# Altium PCB PCB1.PcbDoc
Units mil, origin at the board's own origin, x right, y up, seen from the top; angles counter-clockwise.
Board outline 4000 x 4000 mil, 2 copper layers (Top Layer, Bottom Layer); 10 components, 11 nets, 34 pads, 4 vias.
Unrouted connection lines stored in the file: 23.
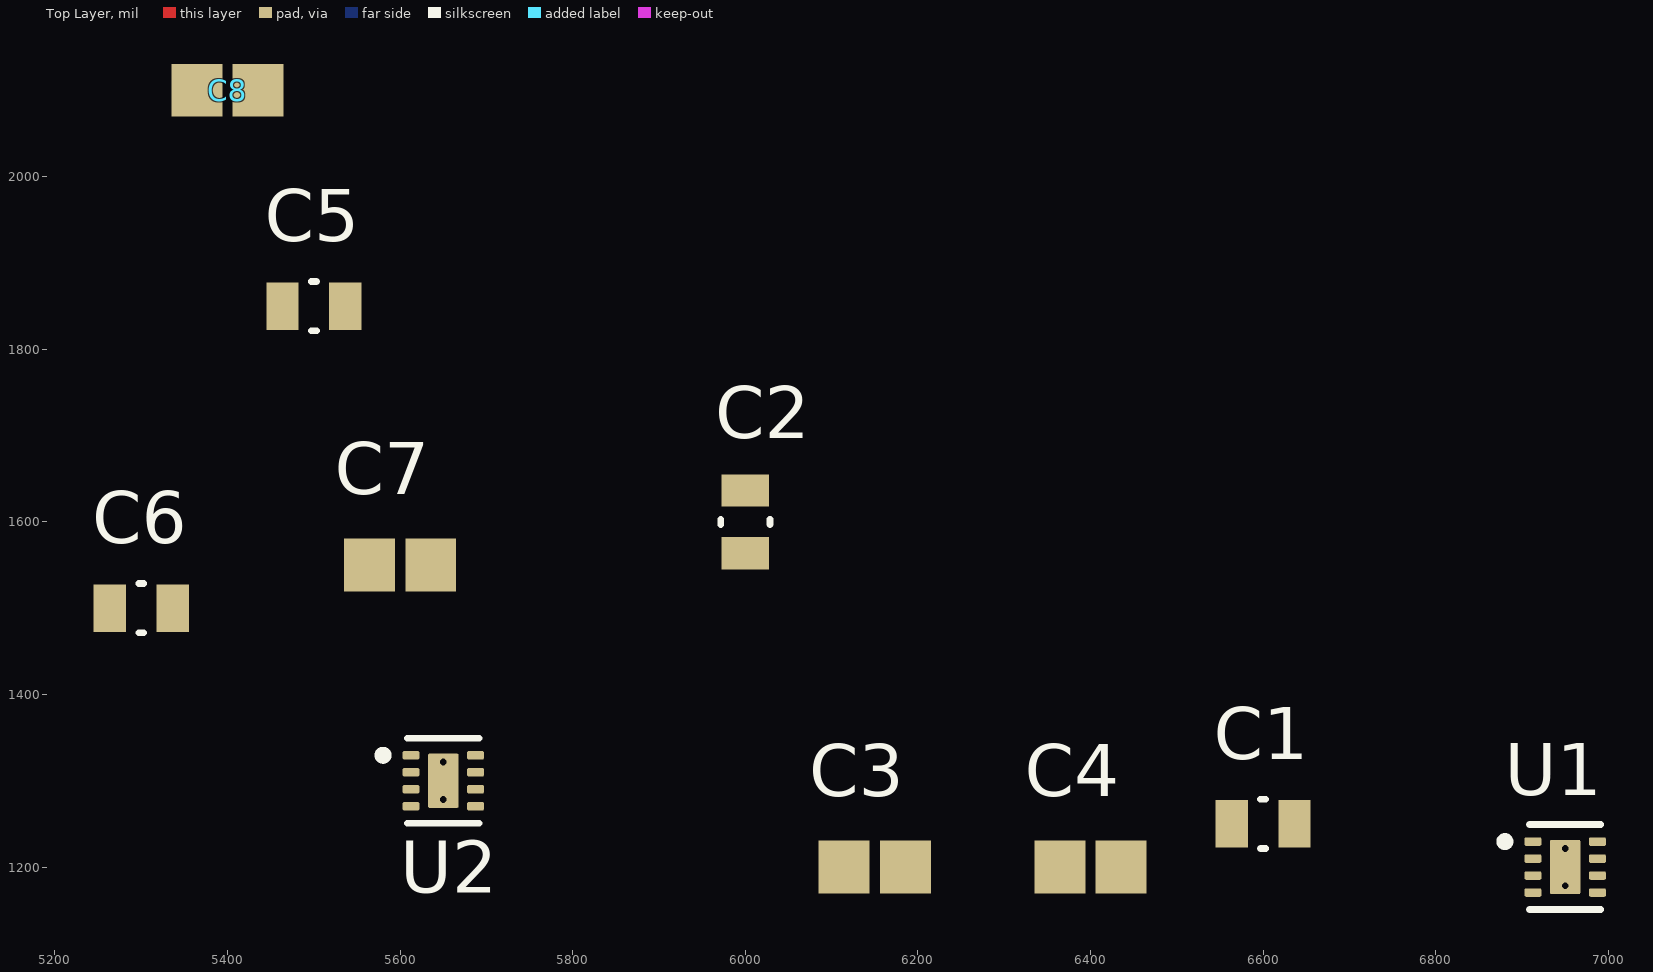
[diagram p0: Top Layer view]
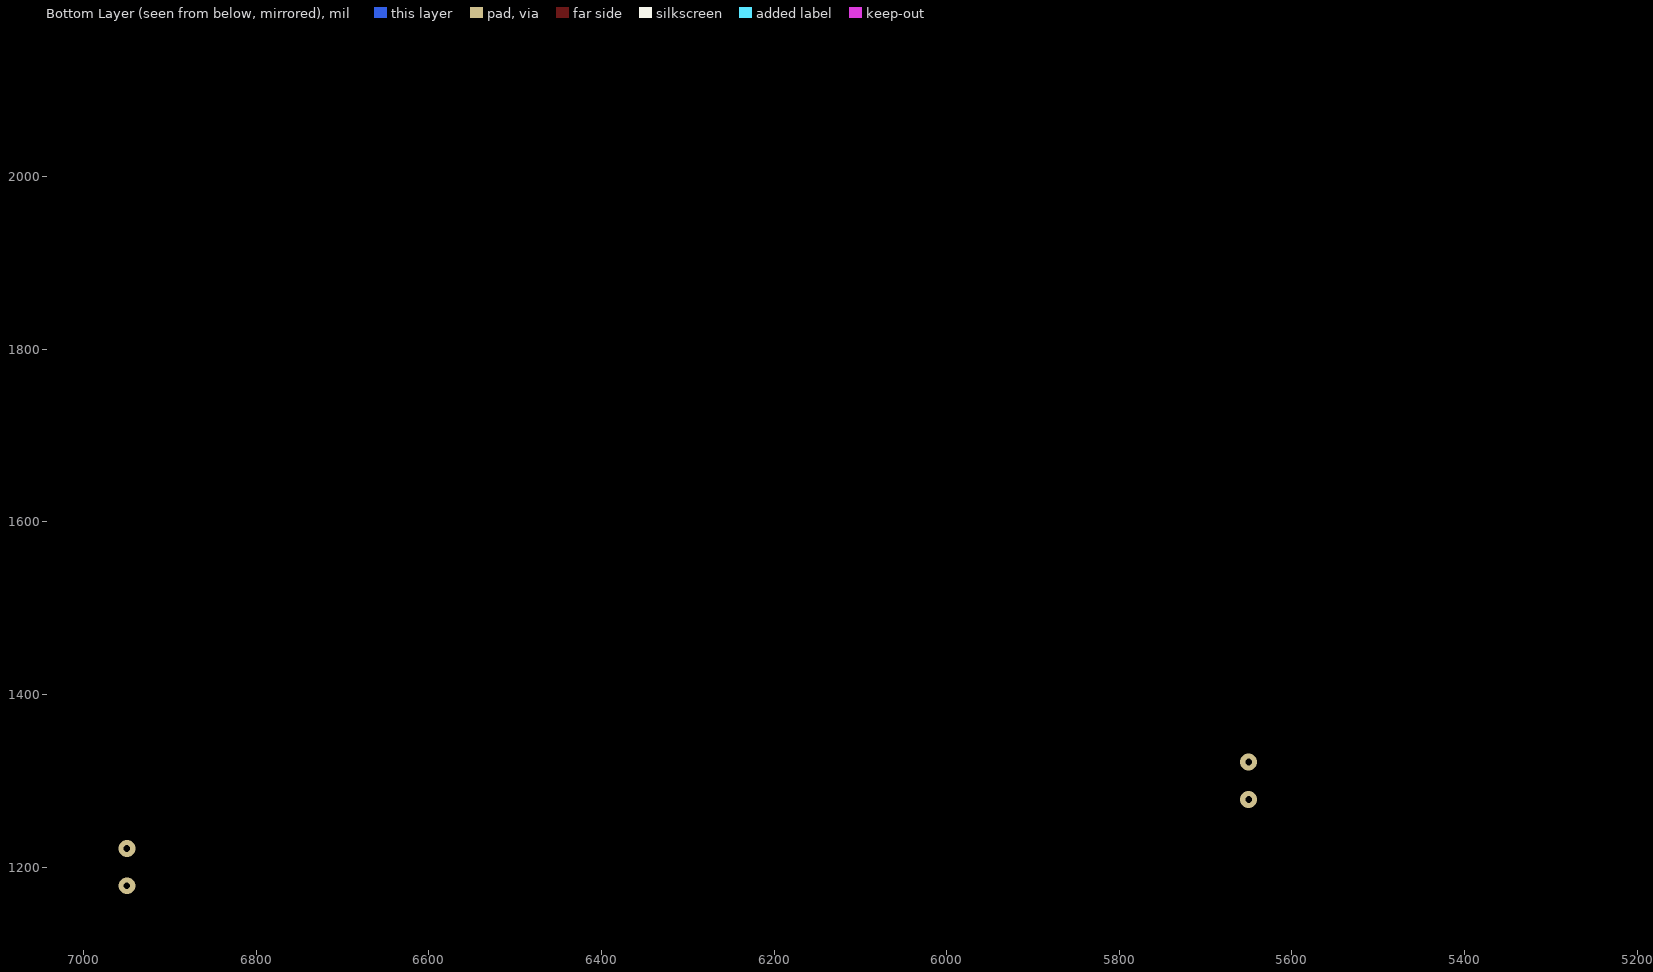
[diagram p1: Bottom Layer view, seen from below]

## Layer stack, top to bottom
Top Solder: solder mask 0.4, Solder Resist, Dk 3.5
Top Layer: signal copper 1.4
Dielectric 1: dielectric 12.6, FR-4, Dk 4.8
Bottom Layer: signal copper 1.4
Bottom Solder: solder mask 0.4, Solder Resist, Dk 3.5

## Board outline
1000,1000 5000,1000 5000,5000 1000,5000

## Design rules (kind name [scope] priority, off if disabled: settings)
Clearance [All] p1: gap=10 ignorepadtopadclearanceinfootprint=FALSE except(0: Arc-Hole Track-Hole SMDPad-Hole THPad-Hole Via-Hole Fill-Hole Poly-Hole Region-Hole Text-Hole)
PolygonConnect [All] p1: connectstyle=Relief reliefconductorwidth=10 reliefentries=4 polygonreliefangle="90 Angle" airgapwidth=10
RoomDefinition Sheet1 [InComponentClass('Sheet1')] p1: confinementstyle=ConfineIn formatcopy=TRUE lockcomponents=FALSE outline 3550,1000 5000,1000 5000,2250 3550,2250
RoutingVias [All] p1: holewidth=28 width=50 viastyle="Through Hole" minholewidth=28 minwidth=50 maxholewidth=28 maxwidth=50
SolderMaskExpansion [All] p1: expansion=4 istentingtop=FALSE
Width [All] p1: maxlimit=10 minlimit=10 preferedwidth=10
30 further rules are at their usual default settings.

## Components (designator, comment, footprint, x,y, rotation, side; value= is the part's Value field where it differs from the comment)
C1 "0.1uF" FP-CC0805-0_85-MFG 6600,1250 r0 top value="100 nF"
C2 "0.1uF" FP-CC0805-0_85-MFG 6000,1600 r90 top value="100 nF"
C3 "1uF" CAPC2013X145X50ML20T25 6150,1200 r0 top
C4 "1uF" CAPC2013X145X50ML20T25 6400,1200 r0 top
C5 "0.1uF" FP-CC0805-0_85-MFG 5500,1850 r0 top value="100 nF"
C6 "0.1uF" FP-CC0805-0_85-MFG 5300,1500 r0 top value="100 nF"
C7 "1uF" CAPC2013X145X50ML20T25 5600,1550 r180 top
C8 "1uF" CAPC2013X145X50ML20T25 5400,2100 r180 top
U1 "DRV8837DSGR" FP-DSG0008A-MFG 6950,1200 r0 top
U2 "DRV8837DSGR" FP-DSG0008A-MFG 5650,1300 r0 top

## Footprints (in the part's own frame and the unit in brackets; to place one, negate y for a bottom-side part, rotate by r counter-clockwise, add the part's x,y. Pads: shape width x height; smd on the part's side, far side on the other; paste and mask are expansions set on the pad)
CAPC2013X145X50ML20T25 [mm] "Chip Capacitor, 2-Leads, Body 2.00x1.25mm, IPC Low Density"
  rect 1.5x1.55 smd: 1(-0.9,0) 2(0.9,0)
  body extent -1.1,-0.72 1.1,0.72, height 1.45
FP-CC0805-0_85-MFG [mm]
  rect 0.95x1.4 smd paste+0 mask+0: 1(-0.925,0) 2(0.925,0)
  silkscreen extent -0.08,-0.72 0.08,0.72, body extent -1.6,-1.05 1.6,1.05, height 0.25
FP-DSG0008A-MFG [mm]
  rrect40% 0.5x0.25 smd paste+0 mask+0: 1(-0.95,0.75) 2(-0.95,0.25) 3(-0.95,-0.25) 4(-0.95,-0.75) 5(0.95,-0.75) 6(0.95,-0.25) 7(0.95,0.25) 8(0.95,0.75)
  rrect11% 0.9x1.6 smd paste-1000 mask+0: 9(0,0)
  silkscreen extent -1.9,-1.25 1.05,1.25, body extent -1.3,-1.15 1.3,1.15, height 0.25

## Part data
C1 C2 C5 C6: library part CMP-1036-04410-2, "CAP CER 0.1UF 25V X7R 0805", Capacitance="100 nF", Case Code (Imperial)=0805, Case Code (Metric)=2012, Dielectric=X7R, Insulation Resistance=100GR, Manufacturer=Yageo, Manufacturer Part Number=CC0805KRX7R8BB104, Max Operating Temperature=125°C, Min Operating Temperature=-55°C, Package=CC0805-0.85, Package Quantity=4000, Resistor Type=Ceramic, Supplier Part Number 1=311-1141-1-ND, Temperature="-30°C to +85°C", Temperature Range High=+85°C, Temperature Range Low=-30°C, Tolerance=0.1, Voltage Rating="25 V", Voltage Rating (DC)=25V, Automotive=No, Case/Package=0805, Category=Cap, ComponentLink1Description=https://datasheet.ciiva.com/8034/70765-8034031.pdf?src-supplier=Element14, ComponentLink1URL=https://datasheet.ciiva.com/8034/70765-8034031.pdf?src-supplier=Element14, ComponentLink2Description=Datasheet, ComponentLink2URL=http://www.yageo.com/documents/recent/UPY-GPHC_Y5V_6.3V-to-50V_8.pdf, ComponentLink3Description=https://datasheet.ciiva.com/28450/1489800-28450789.pdf?src-supplier=Element14, ComponentLink3URL=https://datasheet.ciiva.com/28450/1489800-28450789.pdf?src-supplier=Element14, ComponentLink4Description=https://datasheet.ciiva.com/46430/1850775-46430166.pdf?src-supplier=Element14, ComponentLink4URL=https://datasheet.ciiva.com/46430/1850775-46430166.pdf?src-supplier=Element14, ComponentLink5Description=https://datasheet.ciiva.com/145/mlccorderingcode-145008.pdf?src-supplier=Digi-Key, ComponentLink5URL=https://datasheet.ciiva.com/145/mlccorderingcode-145008.pdf?src-supplier=Digi-Key, ComponentLink6Description=https://datasheet.ciiva.com/145/mlccorderingcode-145007.pdf?src-supplier=Digi-Key, ComponentLink6URL=https://datasheet.ciiva.com/145/mlccorderingcode-145007.pdf?src-supplier=Digi-Key, ComponentLink7Description=https://datasheet.ciiva.com/145/mlccorderingcode-145009.pdf?src-supplier=Digi-Key, ComponentLink7URL=https://datasheet.ciiva.com/145/mlccorderingcode-145009.pdf?src-supplier=Digi-Key, ComponentLink8Description=https://datasheet.ciiva.com/8034/1784427-8034030.pdf?src-supplier=Element14, ComponentLink8URL=https://datasheet.ciiva.com/8034/1784427-8034030.pdf?src-supplier=Element14, Depth=1.25mm, Device Class L1="Passive Components", Device Class L2=Capacitors, Device Class L3="Ceramic Capacitors", Digikey Description="CAP CER 0.1UF 25V X7R 0805", Footprint Url=http://www.yageo.com/exep/pages/download/literatures/UPY-C_GEN_24.pdf, Halogen Free="Halogen Free", Height=0.95mm, Ipc Land Pattern Name=CAPC200125X85, Lead Free=Yes, Length=2mm, Material=Ceramic, Mount="Surface Mount", Mouser Description="Multilayer Ceramic Capacitors MLCC - SMD/SMT 100nF 25V X7R 10%", Number of Pins=2, Octopart=https://octopart.com/cc0805krx7r8bb104-yageo-39467766, Packaging="Tape and Reel", Pricing 1="1=0.11000, 10=0.07700, 50=0.04380, 100=0.03620, 500=0.02542, 1000=0.02104 (USD)", Radiation Hardening=No, Reach SVHC Compliant=Yes, RoHS=TRUE, RoHS Compliant=Yes, Series=CC, Stock 1=1013369, Supplier 1=Digi-Key, Temperature Characteristic=X7R, Termination=SMD/SMT, Thickness=0.033inch, Width=1.25mm
C3 C4 C7 C8: library part CMP-1036-04757-2, Case Code (Imperial)=0805, Case Code (Metric)=2012, Dielectric=Y5V, Manufacturer=Yageo, Manufacturer Part Number=CC0805ZRY5V8BB105, Max Operating Temperature=85°C, Min Operating Temperature=-30°C, Package Quantity=1, Resistor Type=Ceramic, Supplier Part Number 1=311-1358-1-ND, Tolerance=80%, Voltage Rating=25V, Capacitance=1uF, Case/Package=0805, Category="Ceramic Capacitors", ComponentLink1Description=https://datasheet.ciiva.com/144/mlccorderingcode-144703.pdf?src-supplier=Digi-Key, ComponentLink1URL=https://datasheet.ciiva.com/144/mlccorderingcode-144703.pdf?src-supplier=Digi-Key, ComponentLink2Description=https://datasheet.ciiva.com/26863/getdatasheetpartid-419810-26863011.pdf?src-supplier=Verical, ComponentLink2URL=https://datasheet.ciiva.com/26863/getdatasheetpartid-419810-26863011.pdf?src-supplier=Verical, ComponentLink3Description=https://datasheet.ciiva.com/28450/1132289-28450860.pdf?src-supplier=Element14, ComponentLink3URL=https://datasheet.ciiva.com/28450/1132289-28450860.pdf?src-supplier=Element14, ComponentLink4Description=https://datasheet.ciiva.com/144/mlccorderingcode-144704.pdf?src-supplier=Digi-Key, ComponentLink4URL=https://datasheet.ciiva.com/144/mlccorderingcode-144704.pdf?src-supplier=Digi-Key, ComponentLink5Description=https://datasheet.ciiva.com/144/mlccorderingcode-144705.pdf?src-supplier=Digi-Key, ComponentLink5URL=https://datasheet.ciiva.com/144/mlccorderingcode-144705.pdf?src-supplier=Digi-Key, ComponentLink6Description=https://datasheet.ciiva.com/13208/upy-gp-np0-16v-to-50v-8-13208251.pdf?src-supplier=Mouser, ComponentLink6URL=https://datasheet.ciiva.com/13208/upy-gp-np0-16v-to-50v-8-13208251.pdf?src-supplier=Mouser, Depth=1.25mm, Halogen Free="Halogen Free", Height=0.85mm, Lead Free="Lead Free", Length=2mm, Mount="Surface Mount", Packaging="Tape and Reel", Part Number=CC0805ZRY5V8BB105, Pricing 1="1=0.13000, 10=0.09000, 50=0.05100, 100=0.04230, 500=0.02966, 1000=0.02456 (USD)", Radiation Hardening=No, Reach SVHC Compliant=Yes, RoHS=Yes, RoHS Compliant=Yes, Series=CC, Stock 1=286163, Supplier 1=Digi-Key, Termination=SMD/SMT, Thickness=0.033inch, Voltage Rating (DC)=25V, Weight=0.000194oz, Width=1.25mm
U1 U2: library part CMP-04915-000004-1, "IC MOTOR DRIVER PAR 8WSON", Ambient Temperature Range High=+85°C, Ambient Temperature Range Low=-40°C, Manufacturer="Texas Instruments", Max Junction Temp=+150°C, Max Operating Temperature=85°C, Max Output Current=1.8A, Max Supply Voltage=7V, Min Supply Voltage=1.8V, Nominal Supply Current=300-700uA, Output Voltage=0-11V, Package=DSG0008A, Package Quantity=3000, Supplier Part Number 1=296-34806-1-ND, Supply Current=300uA, Switching Frequency=0-250kHz, Temperature="-40°C to +85°C", Automotive=No, Category=IC, ComponentLink1Description=https://datasheet.ciiva.com/15109/getdatasheetpartid-543738-15109646.pdf?src-supplier=Verical, ComponentLink1URL=https://datasheet.ciiva.com/15109/getdatasheetpartid-543738-15109646.pdf?src-supplier=Verical, ComponentLink2Description=Datasheet, ComponentLink2URL=http://www.ti.com/lit/ds/symlink/drv8837.pdf, ComponentLink3Description=https://datasheet.ciiva.com/6602/drv8837-6602821.pdf?src-supplier=Digi-Key, ComponentLink3URL=https://datasheet.ciiva.com/6602/drv8837-6602821.pdf?src-supplier=Digi-Key, Device Class L1="Integrated Circuits (ICs)", Device Class L2="Power Management ICs", Device Class L3="Motor Drivers", Digikey Description="IC MOTOR DRIVER PAR 8WSON", Fault Protection="Over Temperature,Short Circuit", Height=0.8mm, Interface=PWM, Lead Free=Yes, Manufacturer Part Number=DRV8837DSGR, Min Operating Temperature=-40°C, Motor Type=Brushed, Mount="Surface Mount", Mouser Description="Motor / Motion / Ignition Controllers & Drivers 1.8A Low Vltg Brush DC Motor Driver", Number Of Outputs=2, Number of Pins=8, Octopart=https://octopart.com/drv8837dsgr-texas+instruments-23786726, Output Current=1.8A, Packaging="Tape and Reel", Pricing 1="1=1.21000, 10=1.08500, 25=1.03000, 100=0.84600, 250=0.79080, 500=0.69886, 1000=0.55173 (USD)", Radiation Hardening=No, Reach SVHC Compliant=Yes, RoHS=TRUE, RoHS Compliant=Yes, Series=-, Standoff Height=0mm, Stock 1=52410, Supplier 1=Digi-Key, Technology=NMOS, Temperature Range High=+85°C, Temperature Range Low=-40°C, Type="Integrated Circuit (IC)"

## Via types
v1: diameter 19.68, hole 7.87, Top Layer to Bottom Layer, 4 vias

## Nets (pads, with @x,y where several pads share a name; then routed paths per layer and width w, separated by ;. In a path a pad name is that pad's centre, name@x,y a point inside that pad or via, vN(x,y) a via of type N, cw(c..) or ccw(c..) an arc to the next point about the centre after c; other vN are vias at no path point)
3.3V: C2.1 C4.2 C6.1 C8.2 U1.7 U1.8 U2.7 U2.8
12V: C1.1 C3.2 C5.1 C7.2 U1.1 U2.1
GND: C1.2 C2.2 C3.1 C4.1 C5.2 C6.2 C7.1 C8.1 U1.4 U1.9 U2.4 U2.9
  other v1: 6950,1178.35 6950,1221.65 5650,1278.35 5650,1321.65
M1_+: U1.2
M1_-: U1.3
M1_Backward: U1.5
M1_Forward: U1.6
M2_+: U2.2
M2_-: U2.3
M2_Backward: U2.5
M2_Forward: U2.6